# Altium PCB DTImp.PcbDoc
Units mm, origin at the board's own origin, x right, y up, seen from the top; angles counter-clockwise.
Board outline 55 x 55 mm, 2 copper layers (Top Layer, Bottom Layer); 50 components, 59 nets, 209 pads, 10 vias.
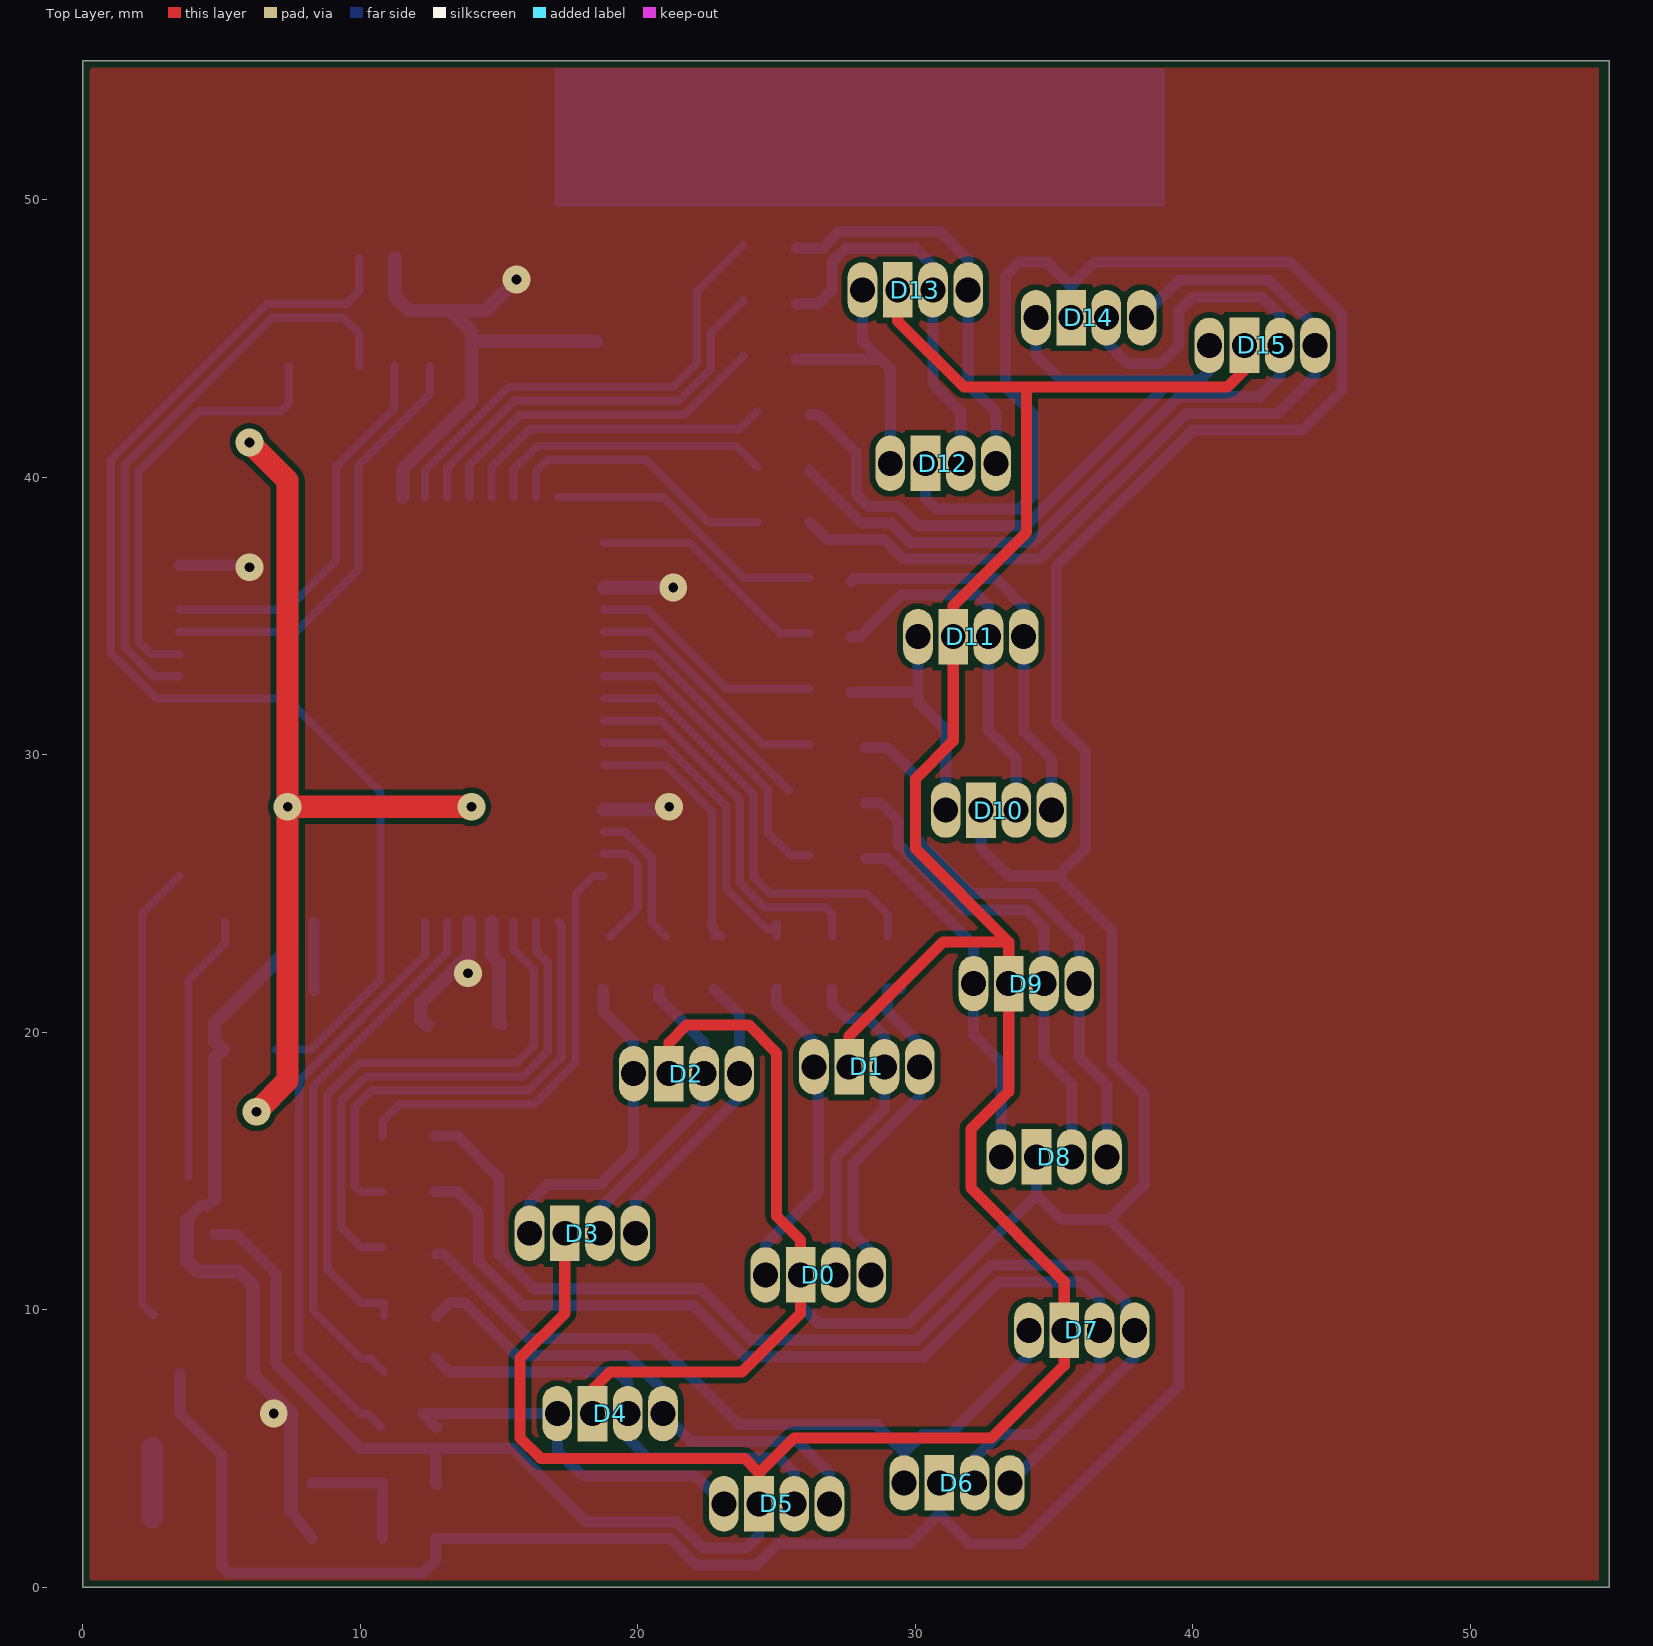
[diagram p0: Top Layer view]
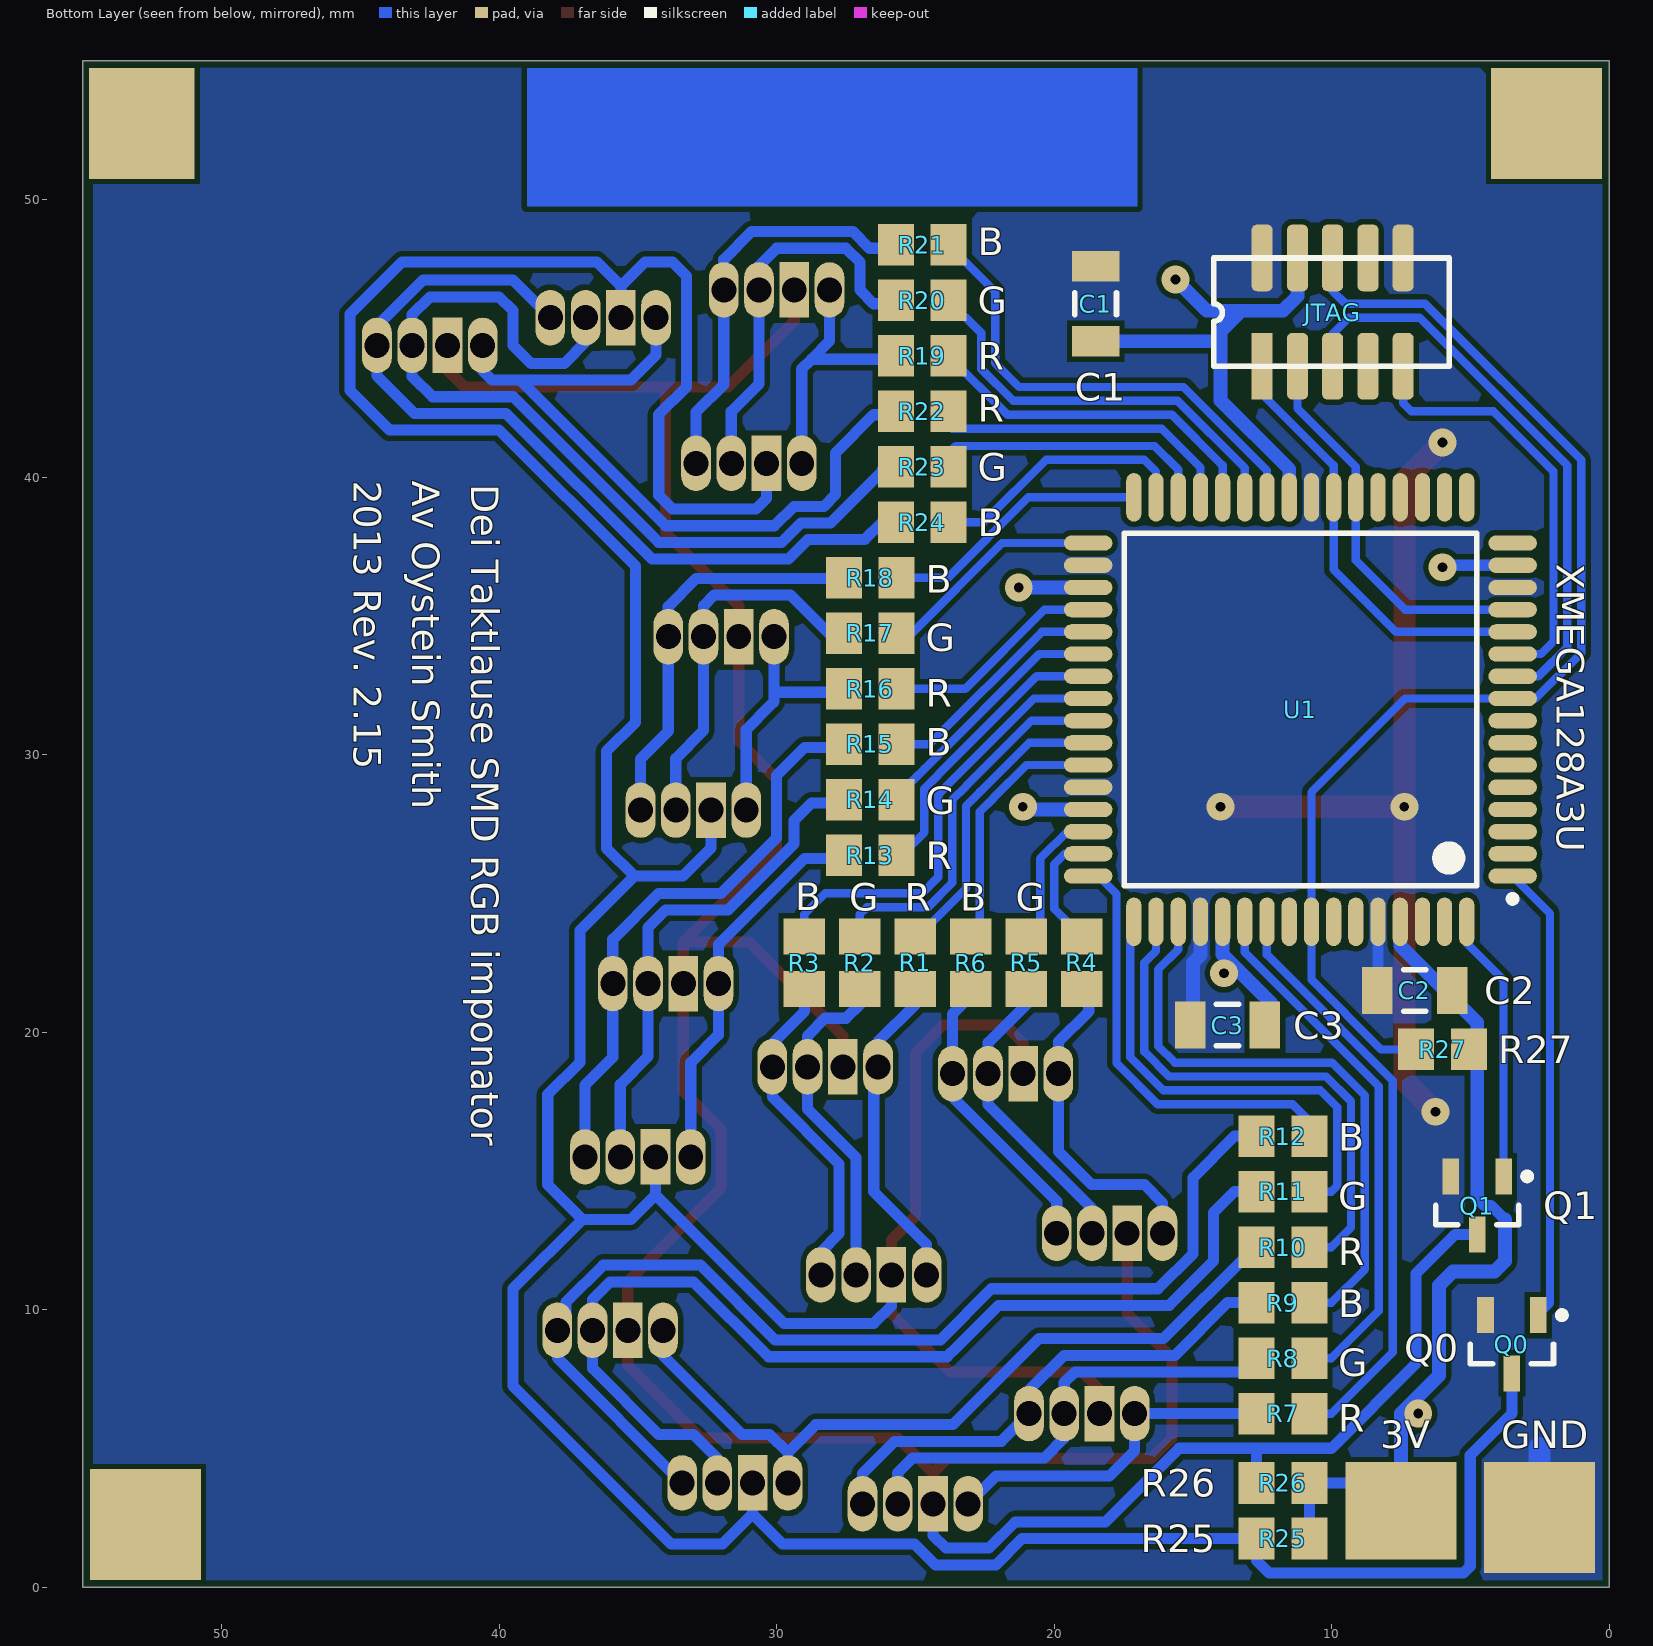
[diagram p1: Bottom Layer view, seen from below]

## Layer stack, top to bottom
Top Solder: solder mask 0.0102, Solder Resist, Dk 3.5
Top Layer: signal copper 0.0356
Dielectric1: dielectric 0.32, FR-4, Dk 4.8
Bottom Layer: signal copper 0.0356
Bottom Solder: solder mask 0.0102, Solder Resist, Dk 3.5

## Board outline
0,55 55,55 55,0 0,0

## Design rules (kind name [scope] priority, off if disabled: settings)
Clearance Clearance_1 [All] p1: gap=0.2
ComponentClearance [All] p1: gap=0.2 collisioncheckmode=3 verticalgap=0.254 showdistances=FALSE
MinimumSolderMaskSliver [All] p1: minsoldermaskwidth=0.1
PlaneConnect [All] p1: planeconnectstyle=Direct reliefexpansion=0.508 reliefentries=4 reliefconductorwidth=0.254 reliefairgap=0.254
PolygonConnect [All] p1: connectstyle=Direct reliefconductorwidth=0.254 reliefentries=4 polygonreliefangle="90 Angle" airgapwidth=0.254
RoutingTopology [All] p1 off: topology=Shortest
RoutingVias [All] p1: holewidth=0.9 width=2 viastyle="Through Hole" minholewidth=0.9 minwidth=2 maxholewidth=0.9 maxwidth=4
SilkToSolderMaskClearance SilkscreenOverComponentPads [IsPad] p1: minsilkscreentomaskgap=0.254 clearancetoexposedcopper=TRUE
SolderMaskExpansion [All] p1: expansion=0
UnpouredPolygon [All] p1: allowunpoured=FALSE
Width [All] p1: maxlimit=4 minlimit=0.2 preferedwidth=0.4
24 further rules are at their usual default settings.

## Components (designator, comment, footprint, x,y, rotation, side; value= is the part's Value field where it differs from the comment)
C1 "Cap Semi" C1206 18.5,46.25 r270 bottom
C2 "Cap Semi" C1206 7,21.5 r180 bottom
C3 "Cap Semi" C1206 13.75,20.25 r180 bottom
D0 "RGB-LED Through Hole" "RGB-LED THROUGH HOLE" 26.5,11.25 r0 top
D1 "RGB-LED Through Hole" "RGB-LED THROUGH HOLE" 28.25,18.75 r0 top
D2 "RGB-LED Through Hole" "RGB-LED THROUGH HOLE" 21.75,18.5 r0 top
D3 "RGB-LED Through Hole" "RGB-LED THROUGH HOLE" 18,12.75 r0 top
D4 "RGB-LED Through Hole" "RGB-LED THROUGH HOLE" 19,6.25 r0 top
D5 "RGB-LED Through Hole" "RGB-LED THROUGH HOLE" 25,3 r0 top
D6 "RGB-LED Through Hole" "RGB-LED THROUGH HOLE" 31.5,3.75 r0 top
D7 "RGB-LED Through Hole" "RGB-LED THROUGH HOLE" 36,9.25 r0 top
D8 "RGB-LED Through Hole" "RGB-LED THROUGH HOLE" 35,15.5 r0 top
D9 "RGB-LED Through Hole" "RGB-LED THROUGH HOLE" 34,21.75 r0 top
D10 "RGB-LED Through Hole" "RGB-LED THROUGH HOLE" 33,28 r0 top
D11 "RGB-LED Through Hole" "RGB-LED THROUGH HOLE" 32,34.25 r0 top
D12 "RGB-LED Through Hole" "RGB-LED THROUGH HOLE" 31,40.5 r0 top
D13 "RGB-LED Through Hole" "RGB-LED THROUGH HOLE" 30,46.75 r0 top
D14 "RGB-LED Through Hole" "RGB-LED THROUGH HOLE" 36.25,45.75 r0 top
D15 "RGB-LED Through Hole" "RGB-LED THROUGH HOLE" 42.5,44.75 r0 top
JTAG "JTAG 1,27mm SMD" "Header 1,27mm SMD 10P" 12.5,44 r90 bottom (schematic designator P1)
Q0 "2N7002" SOT23_N 3.5,8.75 r270 bottom
Q1 "2N7002" SOT23_N 4.75,13.75 r270 bottom
R1 "0805" ERA-0805 25,22.5 r90 bottom
R2 "0805" ERA-0805 27,22.5 r90 bottom
R3 "0805" ERA-0805 29,22.5 r90 bottom
R4 "0805" ERA-0805 19,22.5 r90 bottom
R5 "0805" ERA-0805 21,22.5 r90 bottom
R6 "0805" ERA-0805 23,22.5 r90 bottom
R7 "0805" ERA-0805 11.75,6.25 r180 bottom
R8 "0805" ERA-0805 11.75,8.25 r180 bottom
R9 "0805" ERA-0805 11.75,10.25 r180 bottom
R10 "0805" ERA-0805 11.75,12.25 r180 bottom
R11 "0805" ERA-0805 11.75,14.25 r180 bottom
R12 "0805" ERA-0805 11.75,16.25 r180 bottom
R13 "0805" ERA-0805 26.625,26.375 r180 bottom
R14 "0805" ERA-0805 26.625,28.375 r180 bottom
R15 "0805" ERA-0805 26.625,30.375 r180 bottom
R16 "0805" ERA-0805 26.625,32.375 r180 bottom
R17 "0805" ERA-0805 26.625,34.375 r180 bottom
R18 "0805" ERA-0805 26.625,36.375 r180 bottom
R19 "0805" ERA-0805 24.75,44.375 r180 bottom
R20 "0805" ERA-0805 24.75,46.375 r180 bottom
R21 "0805" ERA-0805 24.75,48.375 r180 bottom
R22 "0805" ERA-0805 24.75,42.375 r180 bottom
R23 "0805" ERA-0805 24.75,40.375 r180 bottom
R24 "0805" ERA-0805 24.75,38.375 r180 bottom
R25 "0805" ERA-0805 11.75,1.75 r180 bottom
R26 "0805" ERA-0805 11.75,3.75 r180 bottom
R27 "0805" ERA-0805 6,19.375 r0 bottom
U1 "ATxmega128A3U-AU" 64A_N 11.125,31.625 r0 bottom

## Footprints (in the part's own frame and the unit in brackets; to place one, negate y for a bottom-side part, rotate by r counter-clockwise, add the part's x,y. Pads: shape width x height; smd on the part's side, far side on the other; paste and mask are expansions set on the pad)
64A_N [mm] "Thin QFP, 64-Leads, Body 14x14mm, Pitch 0.8mm, IPC Medium Density"
  oval 1.75x0.55 smd: 1(-7.65,6) 2(-7.65,5.2) 3(-7.65,4.4) 4(-7.65,3.6) 5(-7.65,2.8) 6(-7.65,2) 7(-7.65,1.2) 8(-7.65,0.4) 9(-7.65,-0.4) 10(-7.65,-1.2) 11(-7.65,-2) 12(-7.65,-2.8) 13(-7.65,-3.6) 14(-7.65,-4.4) 15(-7.65,-5.2) 16(-7.65,-6) 33(7.65,-6) 34(7.65,-5.2) 35(7.65,-4.4) 36(7.65,-3.6) 37(7.65,-2.8) 38(7.65,-2) 39(7.65,-1.2) 40(7.65,-0.4) 41(7.65,0.4) 42(7.65,1.2) 43(7.65,2) 44(7.65,2.8) 45(7.65,3.6) 46(7.65,4.4) 47(7.65,5.2) 48(7.65,6)
  oval 0.55x1.75 smd: 17(-6,-7.65) 18(-5.2,-7.65) 19(-4.4,-7.65) 20(-3.6,-7.65) 21(-2.8,-7.65) 22(-2,-7.65) 23(-1.2,-7.65) 24(-0.4,-7.65) 25(0.4,-7.65) 26(1.2,-7.65) 27(2,-7.65) 28(2.8,-7.65) 29(3.6,-7.65) 30(4.4,-7.65) 31(5.2,-7.65) 32(6,-7.65) 49(6,7.65) 50(5.2,7.65) 51(4.4,7.65) 52(3.6,7.65) 53(2.8,7.65) 54(2,7.65) 55(1.2,7.65) 56(0.4,7.65) 57(-0.4,7.65) 58(-1.2,7.65) 59(-2,7.65) 60(-2.8,7.65) 61(-3.6,7.65) 62(-4.4,7.65) 63(-5.2,7.65) 64(-6,7.65)
  silkscreen extent -7.77,-6.35 6.35,6.95, body extent -7,-7 7,7, height 1.2
C1206 [mm] "Chip Capacitor, Body 3.2x1.6mm, IPC High Density"
  rect 1.1x1.7 smd: 1(-1.35,0) 2(1.35,0)
  silkscreen extent -0.4,-0.75 0.4,0.75, body extent -1.7,-0.9 1.7,0.9, height 1.3
ERA-0805 [mm] "Chip Resistor; Body 2 x 1.3 mm (LxW typ)"
  rect 1.3x1.5 smd: 1(-0.95,0) 2(0.95,0)
"Header 1,27mm SMD 10P" [mm]
  rect 2.4x0.76 smd: 1(0,0)
  rrect50% 2.4x0.76 smd: 2(3.9,0) 3(0,-1.27) 4(3.9,-1.27) 5(0,-2.54) 6(3.9,-2.54) 7(0,-3.81) 8(3.9,-3.81) 9(0,-5.08) 10(3.9,-5.08)
  silkscreen extent 0,-6.75 3.9,1.75
"RGB-LED THROUGH HOLE" [mm]
  oval 1.07x2 hole 0.9: 1(-1.905,0) 3(0.635,0) 4(1.905,0)
  rect 1.07x2 hole 0.9: 2(-0.635,0)
  body extent -2.93,-2.94 2.95,2.94, height 8.7
SOT23_N [mm] "SOT23, 3-Leads, Body 2.9x1.3mm, Pitch 0.95mm, Lead Span 2.3mm, IPC Medium Density"
  rect 1.3x0.6 smd: 1(-1.05,0.95) 2(-1.05,-0.95) 3(1.05,0)
  silkscreen extent -1.17,-1.5 0.7,1.92, body extent -0.7,-1.5 0.7,1.5, height 1.1

## Part data
C1 C2 C3: "Capacitor (Semiconductor SIM Model)"
Q0 Q1: "N-channel Enhancement Mode Field-effect Transistor"
R1 R2 R3 R4 R5 R6 R7 R8 R9 R10 R11 R12 R13 R14 R15 R16 R17 R18 R19 R20 R21 R22 R23 R24 R25 R26 R27: library part ERA6Y, "Rectangular Thick Film Chip Resistor, 10 Ohm to 1M Ohm Range, 0.1% and 0.5% Tolerance, 0805 Size, 0.1 W"
U1: "8/16-bit AVR XMEGA A4 Microcontroller, 1.6-3.6V, 32MHz, 128K + 8KB Flash, 2K EEPROM, 8K SRAM, 64-pin TQFP, Industrial Grade (-40°C to 85°C)"

## Free pads (board coordinates)
  rect 4x4 smd far side: 1(2.5,2.5) 1(52.75,2.25) 3(2.25,52.75)
  rect 4x3.5 smd far side: 2(7.5,2.75)
  rect 3.8x4 smd far side: 2(52.875,52.75)

## Via types
v1: diameter 1, hole 0.35, Top Layer to Bottom Layer, 10 vias

## Nets (pads, with @x,y where several pads share a name; then routed paths per layer and width w, separated by ;. In a path a pad name is that pad's centre, name@x,y a point inside that pad or via, vN(x,y) a via of type N, cw(c..) or ccw(c..) an arc to the next point about the centre after c; other vN are vias at no path point)
B0: R3.2 U1.40 | length 16
  Bottom Layer w0.3: U1.40 20.721,32.025 23.675,29.071 23.675,29.066 24.175,28.566 24.175,25.584 24.759,25 28.25,25 29,24.25 R3.2
B1: R6.2 U1.43 | length 9.7
  Bottom Layer w0.3: U1.43 21,29.625 22.175,28.45 22.175,28.445 22.675,27.945 22.675,23.775 R6.2@22.75,23.7 ; R6.2@22.625,23.875 22.75,23.75 R6.2@22.75,23.7 ; R6.2@22.75,23.45 R6.2@22.75,23.7 ; R6.2 R6.2@22.75,23.7
B2: R9.2 U1.51 | length 22.2
  Bottom Layer w0.3: R9.2@10.85,9.75 10.85,10.2 R9.2 10,10.25 8.8,11.45 8.8,17.714 9.986,18.9 15.65,18.9 16.25,19.5 16.25,22.25 15.525,22.975 U1.51
B3: R12.2 U1.48 | length 15.8
  Bottom Layer w0.3: R12.2 10.8,16.8 11.4,17.4 16.271,17.4 17.75,18.879 17.75,24.975 18.4,25.625 U1.48
B4: R15.2 U1.37 | length 9.1
  Bottom Layer w0.3: U1.37 20.443,34.425 24.493,30.375 R15.2@26.175,30.375
B5: R18.2 U1.32 | length 10.3
  Bottom Layer w0.3: U1.32 20.932,39.275 23.832,36.375 R18.2@26.175,36.375
B6: R21.2 U1.26 | length 17.3
  Bottom Layer w0.3: U1.26 12.325,40.239 15.336,43.25 21.261,43.25 22.125,44.114 22.125,46.7 R21.2
B7: R24.2 U1.31 | length 10
  Bottom Layer w0.3: U1.31 16.325,40.2 16.75,40.625 20.289,40.625 22.539,38.375 R24.2@24.3,38.375
C0: Q0.1 U1.1 | length 16.6
  Bottom Layer w0.3: Q0.1 2.125,10.225 2.125,24.275 U1.1
C1: Q1.1 U1.64 | length 9.7
  Bottom Layer w0.3: Q1.1 3.8,21.875 5.125,23.2 U1.64
G0: R2.2 U1.41 | length 13.7
  Bottom Layer w0.3: U1.41 20.814,31.225 23.175,28.864 23.175,28.859 23.675,28.359 23.675,25.377 24.552,24.5 26.75,24.5 27,24.25 R2.2
G1: R5.2 U1.46 | length 5.1
  Bottom Layer w0.3: U1.46 19.525,27.225 20.5,26.25 20.5,23.95 R5.2
G2: R8.2 U1.54 | length 19.5
  Bottom Layer w0.3: R8.2@10.85,7.75 10.35,8.25 10,8.25 8.3,9.95 8.3,18.05 13.125,22.875 U1.54
G3: R11.2 U1.49 | length 17.1
  Bottom Layer w0.3: R11.2 10,14.25 9.8,14.45 9.8,17.3 10.4,17.9 16.064,17.9 17.25,19.086 17.25,23.85 U1.49
G4: R14.2 U1.38 | length 8.7
  Bottom Layer w0.3: U1.38 20.536,33.625 24.675,29.486 ; 24.672,29.483 24.883,29.272 ; 24.886,29.275 R14.2@25.453,28.707
G5: R17.2 U1.33 | length 8.7
  Bottom Layer w0.3: U1.33 21.875,37.625 25.125,34.375 R17.2@26.175,34.375
G6: R20.2 U1.27 | length 15
  Bottom Layer w0.3: U1.27 13.125,40.332 15.543,42.75 21.468,42.75 22.625,43.907 22.625,45.2 R20.2
G7: R23.2 U1.30 | length 10.4
  Bottom Layer w0.3: U1.30 15.525,40.275 16.375,41.125 23.55,41.125 R23.2@24.3,40.375
GND: C1.1 C2.1 C3.1 JTAG.2 JTAG.10 pad.1@2.5,2.5 Q0.2 Q1.2 U1.14 U1.24 U1.34 U1.44 U1.52 U1.60 | length 40.7
  Top Layer w0.8: v1(6,41.25) 7.375,39.875 v1(7.375,28.125) ; v1(6.25,17.125) 7.375,18.25 v1(7.375,28.125) ; v1(14,28.125) v1(7.375,28.125)
  Bottom Layer w0.4: U1.60 8.325,21.525 C2.1 ; C3.1@15,20.35 C3.1
  Bottom Layer w0.5: U1.52 14.725,22.775 15,22.5 C3.1@15,20.35
  Bottom Layer w0.8: pad.1@2.5,2.5 2.5,5
NetD0_1: D0.1 D1.1 R1.1 | length 12
  Bottom Layer w0.4: D0.1 24.595,12.345 26.5,14.25 26.5,18.595 D1.1 26.345,19.655 25,21 R1.1 R1.1@25,21.25
NetD0_2: D0.2 D2.2 D4.2 D6.2 D8.2 D10.2 D12.2 D14.2 Q0.3 R25.1 | length 171.6
  Top Layer w0.4: D4.2 18.365,7.115 19,7.75 23.75,7.75 25.865,9.865 D0.2 25.865,12.51 25,13.375 25,19.25 24,20.25 21.75,20.25 21.115,19.615 D2.2
  Bottom Layer w0.4: Q0.3 3.5,6.25 5,4.75 5,0.75 5.25,0.5 12.25,0.5 12.7,0.95 R25.1 21.151,1.75 22.101,0.8 24.281,0.8 25.031,1.55 29.78,1.55 30.865,2.635 ; D0.2 25.865,10.135 26.5,9.5 29.73,9.5 34.365,14.135 ; D12.2 30.365,39.235 30.75,38.85 33.75,38.85 34.25,39.35 34.25,42.25 33.25,43.25 33.25,47.25 33.75,47.75 34.75,47.75 35.615,46.885 ; D6.2 30.865,2.635 ; D10.2 32.365,26.635 33.375,25.625 35.125,25.625 ; D8.2 34.365,14.135 ; D14.2 35.615,46.885 ; 30.865,2.635 31.95,1.55 33.8,1.55 39.5,7.25 39.5,10.75 37,13.25 ; 34.365,14.135 35.25,13.25 37,13.25 ; 35.125,25.625 37.092,23.658 37.092,18.908 38.25,17.75 38.25,14.5 37,13.25 ; 35.125,25.625 36.125,26.625 36.125,30.125 35.092,31.158 35.092,36.792 40,41.7 43.95,41.7 45.375,43.125 45.375,45.875 43.5,47.75 36.48,47.75 35.615,46.885
NetD0_3: D0.3 D1.3 R2.1 | length 12.2
  Bottom Layer w0.4: R2.1 27,21 27.5,20.5 28.25,20.5 28.885,19.865 D1.3 28.885,17.234 27.135,15.484 D0.3
NetD0_4: D0.4 D1.4 R3.1 | length 12.5
  Bottom Layer w0.4: D0.4 28.405,12.08 27.75,12.735 27.75,15.25 30.155,17.655 D1.4 30.155,19.595 29,20.75 R3.1 R3.1@29.45,21.55
NetD1_2: D1.2 D3.2 D5.2 D7.2 D9.2 D11.2 D13.2 D15.2 Q1.3 R26.1 | length 124
  Top Layer w0.4: D3.2 17.365,9.865 15.75,8.25 15.75,5.375 16.5,4.625 23.855,4.625 24.365,4.115 ; D5.2 24.365,4.115 ; D1.2 27.615,19.865 31,23.25 33.365,23.25 ; D13.2 29.365,45.635 31.75,43.25 34,43.25 ; D15.2 41.865,43.865 41.25,43.25 34,43.25 ; 24.365,4.115 25.625,5.375 32.75,5.375 35.365,7.99 D7.2 35.365,11.01 32,14.375 32,16.5 33.365,17.865 D9.2 33.365,23.25 ; 33.365,23.25 30,26.615 30,29.125 31.365,30.49 D11.2 31.365,35.365 34,38 34,43.25
  Bottom Layer w0.4: Q1.3 5.55,12.7 6.95,11.3 6.95,8.05 10,5 12.75,5 ; R26.1@12.75,3.7 R26.1 12.7,4.95 12.75,5 ; D5.2 24.365,1.865 23.9,1.4 22.35,1.4 21.4,2.35 18.15,2.35 15.5,5 12.75,5
NetD2_1: D2.1 D3.1 R4.1 | length 12.2
  Bottom Layer w0.4: D3.1 16.095,13.845 16.75,14.5 18.651,14.5 19.845,15.694 D2.1 19.845,19.655 18.75,20.75 18.75,21.55 R4.1@18.75,21.25
NetD2_3: D2.3 D3.3 R5.1 | length 11
  Bottom Layer w0.4: D3.3 18.635,13.635 22.385,17.385 D2.3 22.385,19.615 20.75,21.25 R5.1@20.75,21.55
NetD2_4: D2.4 D3.4 R6.1 | length 10.7
  Bottom Layer w0.4: D3.4 19.905,13.905 23.655,17.655 D2.4 23.655,20.645 R6.1@22.75,21.55
NetD4_1: D4.1 D5.1 R7.1 | length 13.7
  Bottom Layer w0.4: R7.1@12.75,5.75 12.25,6.25 D4.1 17.095,4.905 18,4 22.095,4 D5.1
NetD4_3: D4.3 D5.3 R8.1 | length 16.9
  Bottom Layer w0.4: R8.1 13.2,7.75 19.25,7.75 19.635,7.365 D4.3 19.635,5.365 20.35,4.65 25.1,4.65 25.635,4.115 D5.3
NetD4_4: D4.4 D5.4 R9.1 | length 18.5
  Bottom Layer w0.4: R9.1@12.75,9.75 13.25,10.25 13.75,10.25 15.65,8.35 19.65,8.35 20.905,7.095 D4.4 21.905,5.25 25.75,5.25 26.905,4.095 D5.4
NetD6_1: D6.1 D7.1 R10.1 | length 27.8
  Bottom Layer w0.4: R10.1@12.75,12 13,12 16.05,8.95 20.55,8.95 23.65,5.85 28.59,5.85 29.595,4.845 ; D6.1 29.595,4.845 ; D7.1 34.095,8.345 31.25,5.5 30.25,5.5 29.595,4.845
NetD6_3: D6.3 D7.3 R11.1 | length 38
  Bottom Layer w0.4: R11.1 13.5,14.25 14.25,13.5 14.25,11.75 15.85,10.15 22,10.15 23.5,8.65 23.501,8.65 23.851,8.3 30.3,8.3 33,11 36,11 36.635,10.365 D7.3 36.635,7.885 34.25,5.5 33,5.5 32.135,4.635 D6.3
NetD6_4: D6.4 D7.4 R12.1 | length 39.7
  Bottom Layer w0.4: R12.1 13.5,16.25 15,14.75 15,12 16.25,10.75 22.25,10.75 24.1,8.9 30.051,8.9 32.751,11.6 36.249,11.6 37.585,10.264 37.585,9.57 D7.4 37.905,8.25 D6.4
NetD8_1: D8.1 D9.1 R13.1 | length 13.2
  Bottom Layer w0.4: R13.1@28.2,26.25 29,26.25 32.095,23.155 D9.1 32.095,19.905 33.095,18.905 D8.1
NetD8_3: D8.3 D9.3 R14.1 | length 17.5
  Bottom Layer w0.4: R14.1@28.2,28.25 28.75,28.25 29.375,27.625 29.375,26.776 31.751,24.4 34,24.4 34.635,23.765 D9.3 34.635,19.115 35.635,18.115 D8.3
NetD8_4: D8.4 D9.4 R15.1 | length 20.5
  Bottom Layer w0.4: R15.1@28.2,30.25 29,30.25 30,29.25 30,27 32,25 34.25,25 35.905,23.345 D9.4 ; D9.4@35.585,21.75 D9.4 ; D8.4 36.905,18.095 35.905,19.095 D9.4
NetD10_1: D10.1 D11.1 R16.1 | length 9.1
  Bottom Layer w0.4: R16.1@27.7,32.25 30.095,32.25 ; D11.1 30.095,32.25 ; D10.1 31.095,30 31.095,30.905 30.25,31.75 30.095,31.905 30.095,32.25
NetD10_3: D10.3 D11.3 R17.1 | length 13.5
  Bottom Layer w0.4: R17.1@27.7,34.25 28,34.25 29.5,35.75 32.25,35.75 32.635,35.365 D11.3 32.635,30.865 33.635,29.865 D10.3
NetD10_4: D10.4 D11.4 R18.1 | length 14.4
  Bottom Layer w0.4: R18.1@27.7,36.25 27.8,36.35 32.9,36.35 33.905,35.345 D11.4 33.905,30.845 34.905,29.845 D10.4
NetD12_1: D12.1 D13.1 R19.1 | length 9.7
  Bottom Layer w0.4: R19.1@25.7,44.25 28.75,44.25 ; D13.1 28.095,44.905 28.75,44.25 ; D12.1 29.095,43.905 28.75,44.25
NetD12_3: D12.3 D13.3 R20.1 | length 14.1
  Bottom Layer w0.4: R20.1@25.7,46.25 26.5,46.25 27,46.75 27,47.75 27.5,48.25 30,48.25 30.635,47.615 D13.3 30.635,43.365 31.635,42.365 D12.3
NetD12_4: D12.4 D13.4 R21.1 | length 14.6
  Bottom Layer w0.4: R21.1@25.7,48.25 26.651,48.25 27.251,48.85 30.9,48.85 31.905,47.845 D13.4 31.905,43.345 32.905,42.345 D12.4
NetD14_1: D14.1 D15.1 R22.1 | length 26.8
  Bottom Layer w0.4: R22.1@26.2,42.25 26.5,42.25 27.875,40.875 27.875,39.375 28.3,38.95 29.372,38.95 30.072,38.25 34,38.25 39.25,43.5 ; D14.1 34.345,44.405 35.25,43.5 39.25,43.5 ; D15.1 40.595,43.845 40.25,43.5 39.25,43.5
NetD14_3: D14.3 D15.3 R23.1 | length 32.2
  Bottom Layer w0.4: R23.1@26.2,40.25 26.2,40.201 28.051,38.35 29.124,38.35 29.824,37.65 34.249,37.65 39.499,42.9 42.4,42.9 43.135,43.635 D15.3 43.135,45.865 42.5,46.5 40,46.5 39.5,46 39.5,44.75 38.85,44.1 37.65,44.1 36.885,44.865 D14.3
NetD14_4: D14.4 D15.4 R24.1 | length 30.8
  Bottom Layer w0.4: R24.1@26.2,38.375 26.825,37.75 28.875,37.75 29.575,37.05 34.497,37.05 39.747,42.3 43.05,42.3 44.405,43.655 D15.4 44.405,45.444 42.749,47.1 39.505,47.1 D14.4
R0: R1.2 U1.42 | length 11.3
  Bottom Layer w0.3: U1.42 20.907,30.425 22.675,28.657 22.675,28.652 23.175,28.152 23.175,25.17 24.663,23.682 24.768,23.682 25,23.914 R1.2
R1: R4.2 U1.47 | length 4.4
  Bottom Layer w0.3: U1.47@18.75,26.425 19.618,26.425 20,26.043 20,24.45 R4.2
R2: R7.2 U1.55 | length 21.5
  Bottom Layer w0.3: R7.2@10.75,5.75 10.25,6.25 10,6.25 7.8,8.45 7.8,18.257 12.334,22.791 12.334,23.966 U1.55
R3: R10.2 U1.50 | length 19.4
  Bottom Layer w0.3: R10.2 10,12.25 9.3,12.95 9.3,17.507 10.193,18.4 15.857,18.4 16.75,19.293 16.75,22.5 16.325,22.925 U1.50
R4: R13.2 U1.39 | length 11
  Bottom Layer w0.3: U1.39 20.628,32.825 24.175,29.278 24.175,29.273 24.675,28.773 24.675,27.2 25.5,26.375 R13.2@26.175,26.375
R5: R16.2 U1.36 | length 8.6
  Bottom Layer w0.3: U1.36 20.35,35.225 23.2,32.375 R16.2@26.175,32.375
R6: R19.2 U1.28 | length 12.7
  Bottom Layer w0.3: U1.28 13.925,40.425 15.75,42.25 21.675,42.25 R19.2
R7: R22.2 U1.29 | length 11.5
  Bottom Layer w0.3: U1.29 14.725,40.35 16.125,41.75 23.675,41.75 R22.2@24.3,42.375
RESET: JTAG.6 R27.2 U1.9 U1.57 | length 43
  Bottom Layer w0.3: R27.2 8.211,19.375 10.725,21.889 U1.57 10.725,28.65 7.35,32.025 U1.9 2.643,32.025 1,33.668 1,40.625 6.625,46.25 9.5,46.25 9.96,46.71 JTAG.6
TCK: JTAG.1 U1.12 U1.23 | length 15.8
  Bottom Layer w0.3: U1.12 7.675,34.425 9.925,36.675 U1.23 9.925,40.425 12.5,43 JTAG.1
TDI: JTAG.9 U1.11 | length 15.6
  Bottom Layer w0.3: U1.11 2.457,33.625 2,34.082 2,40.211 4.164,42.375 7.125,42.375 7.42,42.67 JTAG.9
TDO: JTAG.3 U1.13 U1.22 | length 14.3
  Bottom Layer w0.3: U1.13 7.35,35.225 9.125,37 U1.22 9.125,40.375 11.23,42.48 JTAG.3
TMS: JTAG.5 U1.10 | length 21
  Bottom Layer w0.3: U1.10 2.55,32.825 1.5,33.875 1.5,40.418 6.832,45.75 9.375,45.75 9.96,45.165 JTAG.5
VCC: C1.2 C2.2 C3.2 JTAG.4 pad.2@7.5,2.75 R25.2 R26.2 R27.1 U1.15 U1.25 U1.35 U1.45 U1.53 U1.61 | length 62.5
  Bottom Layer w0.4: U1.15 5.925,36.825 v1(6,36.75) ; 3.75,13.25 4.25,13.75 4.5,13.75 4.75,14 ; pad.2@7.5,2.75 pad.2@8.25,1.75 ; pad.2@8.25,3.75 R26.2 R25.2
  Bottom Layer w0.5: 3.75,13.25 3.75,11.75 4.125,11.375 5.625,11.375 6.125,10.875 6.125,7.625 7.5,6.25 pad.2@7.5,2.75 ; 4.75,14 4.75,19.075 R27.1 4.75,19.675 4.75,20.35 7.525,23.125 U1.61 ; JTAG.4 11.23,46.52 11.75,46 13.25,46 ; U1.25 11.525,40.288 14,42.763 14,44.875 ; C3.2 12.174,20.476 12.174,21.049 13.925,22.8 U1.53 ; v1(15.625,47.125) 14.5,46 13.25,46 ; C1.2 14.025,44.9 14,44.875 ; U1.45 v1@20.725,28.025 ; U1.35 v1(21.275,36.025) ; 13.25,46 14,45.25 14,44.875 ; v1(21.275,36.025) 21.275,36.225 21.375,36.125 v1(21.275,36.025)
  other v1: 6.875,6.25 13.875,22.125 21.125,28.125
pads on no net: JTAG.7 JTAG.8 U1.2 U1.3 U1.4 U1.5 U1.6 U1.7 U1.8 U1.16 U1.17 U1.18 U1.19 U1.20 U1.21 U1.56 U1.58 U1.59 U1.62 U1.63

## Polygon pours and split planes (outlines as drawn)
VCC on Top Layer "Top Layer-No Net" (solid, pour order 3): 0.25,54.75 54.625,54.75 54.625,0.25 0.25,0.25
GND on Bottom Layer "Bottom Layer-No Net" (solid, pour order 2): 54.625,0.25 54.625,54.75 0.25,54.75 0.25,0.25

## Other copper
Bottom Layer:
  rectangle: 17,49.75 39,54.75

## Silkscreen, mask and mechanical layers (free items; w line width, h text height)
Bottom Overlay:
  text "B" at 22.75,48 h1
  text "G" at 22.75,45.875 h1
  text "R" at 22.75,43.875 h1
  text "C1" at 19.25,42.75 h1
  text "R" at 22.75,42 h1
  text "G" at 22.75,39.875 h1
  text "Av Oystein Smith" at 43.125,39.875 h1 r90
  text "2013 Rev. 2.15" at 45.25,39.875 h1 r90
  text "Dei Taktlause SMD RGB imponator" at 41,39.75 h1 r90
  text "B" at 22.75,37.875 h1
  text "XMEGA128A3U" at 1.875,36.875 h1 r90
  text "B" at 24.625,35.843 h1
  text "G" at 24.625,33.718 h1
  text "R" at 24.625,31.718 h1
  text "B" at 24.625,29.968 h1
  text "G" at 24.625,27.843 h1
  text "R" at 24.625,25.875 h1
  text "B" at 29.33,24.387 h1
  text "G" at 21.375,24.375 h1
  text "B" at 23.375,24.375 h1
  text "R" at 25.375,24.375 h1
  text "G" at 27.375,24.375 h1
  text "C2" at 4.5,21 h1
  text "C3" at 11.375,19.75 h1
  text "R27" at 4,18.875 h1
  text "B" at 9.75,15.718 h1
  text "G" at 9.75,13.593 h1
  text "Q1" at 2.375,13.25 h1
  text "R" at 9.75,11.593 h1
  text "B" at 9.75,9.718 h1
  text "Q0" at 7.375,8.125 h1
  text "G" at 9.75,7.593 h1
  text "R" at 9.75,5.593 h1
  text "GND" at 3.875,5 h1
  text "3V" at 8.25,5 h1
  text "R26" at 16.875,3.25 h1
  text "R25" at 16.875,1.25 h1
Mechanical 2:
  lines w0.1: 0,0 50,0 50,50 0,50 0,0